# EAGLE board dual-channel-buck-v0 (EAGLE 5.07)
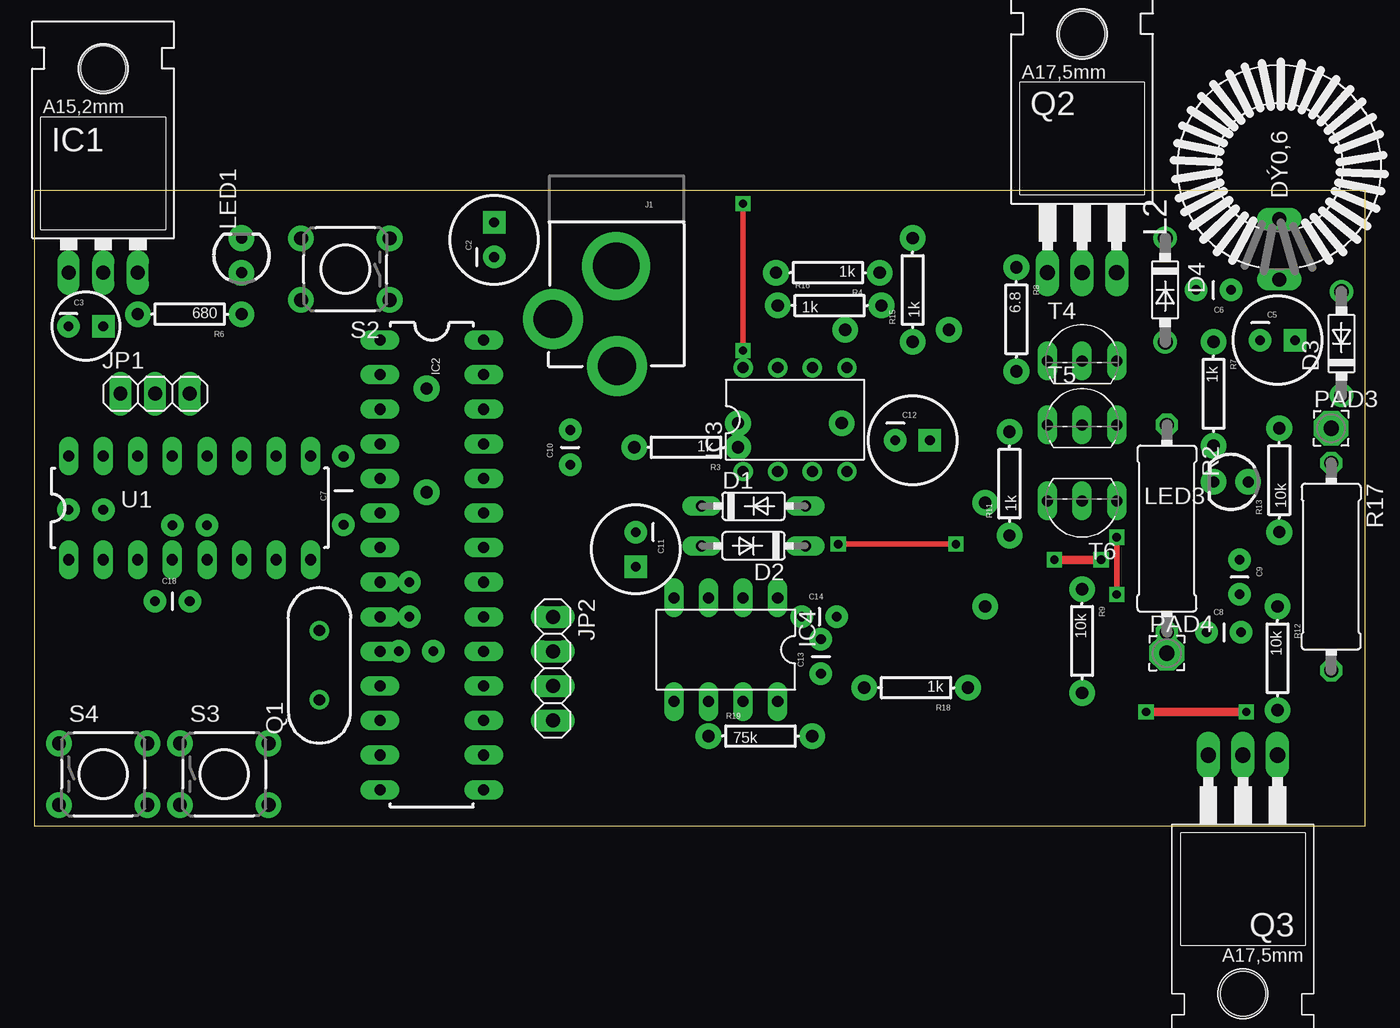
[diagram p0: board, top side]
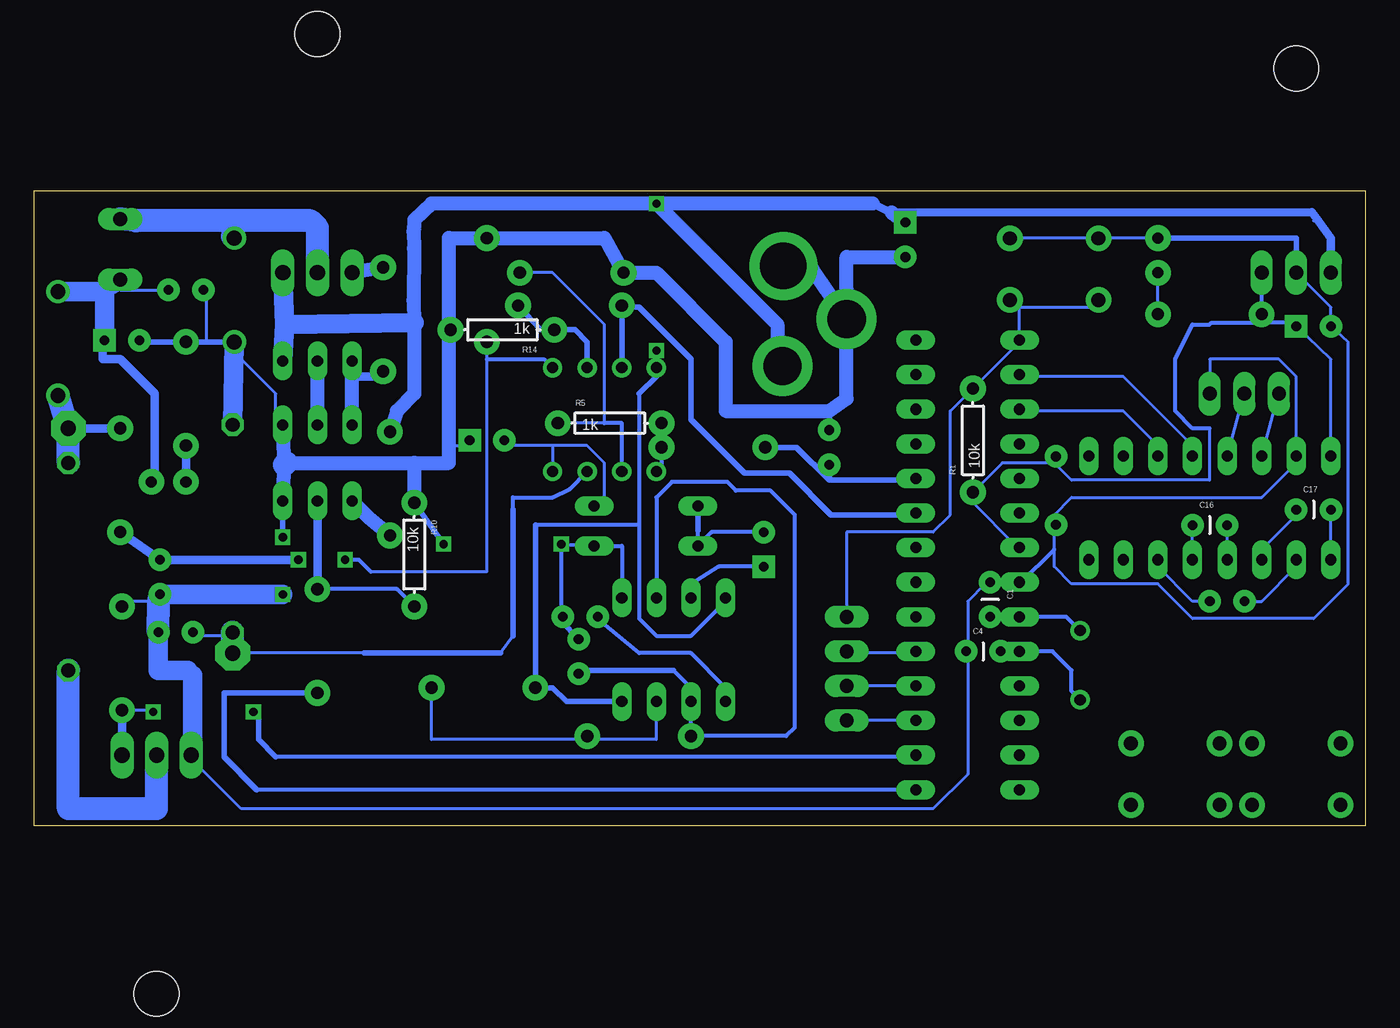
[diagram p1: board, bottom side, seen from below]

Size 97.77 x 46.66 mm. Coordinates in mm from the lower left corner, seen from the top.
Outline: 0,0 97.77,0 97.77,46.66 0,46.66 0,0
Copper layers (1*16): Top 0.035mm / dielectric 1.5mm / Bottom 0.035mm
Design rules "SparkFun-diy": minimum track width 8mil, minimum drill 20mil, track to track 10mil, track to pad 10mil, pad to pad 10mil, via to via 10mil, smd to smd 10mil, copper to edge 10mil, drill to drill 8mil, minimum pad ring 12mil, minimum via ring 10mil, stop-mask expansion 4mil, vias tented up to drill 25mil, thermal gap 10mil

## Footprints (pad centres in the part's own frame; a part is rotated, then mirrored left to right if it is on the bottom)
CAP-PTH-SMALL = drill 0.7 pad 1.651 round: 1 0,0; 2 2.54,0
CPOL-RADIAL-100UF-25V = drill 0.7 pad 1.651 square: 1 1.27,0 | drill 0.7 pad 1.651 round: 2 -1.27,0
CPOL-RADIAL-10UF-25V = drill 0.7 pad 1.651 square: 1 1.27,0 | drill 0.7 pad 1.651 round: 2 -1.27,0
CAP-PTH-5MM = drill 0.7 pad 1.651 round: 1 -2.5,0; 2 2.5,0
DO35-7 = drill 0.813 long: A 3.81,0; C -3.81,0
DO41-7.6 = drill 1.1 pad 1.7 round: A 3.81,0; C -3.81,0
78XXL = drill 1.016 long: GND 0,-3.81; IN -2.54,-3.81; OUT 2.54,-3.81 | hole 3.302: 0,11.176
DIL28-3 = drill 0.813 long: 1 -16.51,-3.81; 2 -13.97,-3.81; 3 -11.43,-3.81; 4 -8.89,-3.81; 5 -6.35,-3.81; 6 -3.81,-3.81; 7 -1.27,-3.81; 8 1.27,-3.81; 9 3.81,-3.81; 10 6.35,-3.81; 11 8.89,-3.81; 12 11.43,-3.81; 13 13.97,-3.81; 14 16.51,-3.81; 15 16.51,3.81; 16 13.97,3.81; 17 11.43,3.81; 18 8.89,3.81; 19 6.35,3.81; 20 3.81,3.81; 21 1.27,3.81; 22 -1.27,3.81; 23 -3.81,3.81; 24 -6.35,3.81; 25 -8.89,3.81; 26 -11.43,3.81; 27 -13.97,3.81; 28 -16.51,3.81
DIL08 = drill 0.813 pad 1.27 round: 1 -3.81,-3.81; 2 -1.27,-3.81; 3 1.27,-3.81; 4 3.81,-3.81; 5 3.81,3.81; 6 1.27,3.81; 7 -1.27,3.81; 8 -3.81,3.81
DIL-08 = drill 0.813 long: 1 -3.81,-3.81; 2 -1.27,-3.81; 3 1.27,-3.81; 4 3.81,-3.81; 5 3.81,3.81; 6 1.27,3.81; 7 -1.27,3.81; 8 -3.81,3.81
POWER_JACK_2.1X5.5_BIG_PTH = drill 3.4 pad 5 round: GND -0.053,7.35 | drill 2.8 pad 4.4 round: GNDBREAK -4.7,3.451; PWR 0,0
1X03 = drill 1.016 long: 1 -2.54,0; 2 0,0; 3 2.54,0
1X04 = drill 1.016 long: 1 -3.81,0; 2 -1.27,0; 3 1.27,0; 4 3.81,0
ED16 = drill 1.016 long: 1 -8.255,0; 2 -3.81,0
LED3MM = drill 0.813 pad 1.88 round: A -1.27,0; K 1.27,0
2,54/1,1 = drill 1.118 pad 2.54 octagon: 1 0,0
HC49US = drill 0.813 round: 1 -2.54,0; 2 2.54,0
TO220BH = drill 1.118 long: D 0,-6.35; G -2.54,-6.35; S 2.54,-6.35 | hole 3.302: 0,11.176
TO220 = drill 1.118 long: 1 -2.54,-6.35; 2 0,-6.35; 3 2.54,-6.35 | hole 3.302: 0,11.176
AXIAL-0.3 = drill 0.9 pad 1.88 round: P$1 -3.81,0; P$2 3.81,0
0414/15 = drill 1.016 octagon: 1 -7.62,0; 2 7.62,0
TACTILE-PTH = drill 1.016 pad 1.88 round: 1 -3.251,2.261; 2 3.251,2.261; 3 -3.251,-2.261; 4 3.251,-2.261
TO92-EBC = drill 0.813 long: B 0,-1.27; C 2.54,-1.27; E -2.54,-1.27
DIL16 = drill 0.813 long: 1 -8.89,-3.81; 2 -6.35,-3.81; 3 -3.81,-3.81; 4 -1.27,-3.81; 5 1.27,-3.81; 6 3.81,-3.81; 7 6.35,-3.81; 8 8.89,-3.81; 9 8.89,3.81; 10 6.35,3.81; 11 3.81,3.81; 12 1.27,3.81; 13 -1.27,3.81; 14 -3.81,3.81; 15 -6.35,3.81; 16 -8.89,3.81

## Placement (x,y rotation side)
C1  22  [CAP-PTH-SMALL]  27.56,17.91 270 bottom
C2  100uf  [CPOL-RADIAL-100UF-25V]  33.78,43.05 90 top
C3  10uf  [CPOL-RADIAL-10UF-25V]  3.81,36.7 0 top
C4  22  [CAP-PTH-SMALL]  29.34,12.83 0 bottom
C5  470uf  [CPOL-RADIAL-100UF-25V]  91.31,35.69 0 top
C6  0.01  [CAP-PTH-SMALL]  87.88,39.37 180 top
C7  0.1  [CAP-PTH-5MM]  22.73,24.64 90 top
C8  [CAP-PTH-SMALL]  86.11,14.22 0 top
C9  [CAP-PTH-SMALL]  88.52,19.56 270 top
C10  [CAP-PTH-SMALL]  39.37,26.54 90 top
C11  100uf  [CPOL-RADIAL-100UF-25V]  44.2,20.32 270 top
C12  100uf  [CPOL-RADIAL-100UF-25V]  64.52,28.32 0 top
C13  0.01  [CAP-PTH-SMALL]  57.78,11.18 90 top
C14  0.01  [CAP-PTH-SMALL]  56.39,15.37 0 top
C16  0.1  [CAP-PTH-SMALL]  12.7,22.1 0 bottom
C17  0.1  [CAP-PTH-SMALL]  5.08,23.24 0 bottom
C18  0.1  [CAP-PTH-SMALL]  8.89,16.51 0 top
D1  1N4148DO35-7  [DO35-7]  52.83,23.5 0 top
D2  1N4148DO35-7  [DO35-7]  52.83,20.57 180 top
D3  1N5819-B  [DO41-7.6]  96.01,35.43 90 top
D4  1N5819-B  [DO41-7.6]  83.06,39.37 270 top
IC1  7805  [78XXL]  5.08,44.45 0 top
IC2  AVR-MEGA8-PPTH  [DIL28-3]  29.21,19.18 270 top
IC3  TL062P  [DIL08]  55.88,29.84 0 top
IC4  NE555  [DIL-08]  50.8,12.95 180 top
J1  POWER_JACKPTH_BIG  [POWER_JACK_2.1X5.5_BIG_PTH]  42.8,33.78 0 top
JP1  [1X03]  8.89,31.75 0 top
JP2  [1X04]  38.1,11.56 270 top
L2  [ED16]  91.44,48.39 90 top
LED1  RED  [LED3MM]  15.24,41.91 90 top
LED3  RED  [LED3MM]  87.88,25.27 180 top
PAD3  [2,54/1,1]  95.25,29.21 0 top
PAD4  [2,54/1,1]  83.19,12.7 0 top
Q1  [HC49US]  20.95,11.81 90 top
Q2  [TO220BH]  76.96,46.99 0 top
Q3  IRF540  [TO220]  88.77,-1.14 180 top
R1  10k  [AXIAL-0.3]  28.83,28.32 90 bottom
R2  0.1R  [0414/15]  83.19,21.84 270 top
R3  1k  [AXIAL-0.3]  47.88,27.81 180 top
R4  1k  [AXIAL-0.3]  58.29,40.64 180 top
R5  1k  [AXIAL-0.3]  55.5,29.59 0 bottom
R6  680  [AXIAL-0.3]  11.43,37.59 180 top
R7  1k  [AXIAL-0.3]  86.61,31.75 270 top
R8  6.8  [AXIAL-0.3]  72.14,37.21 270 top
R9  10k  [AXIAL-0.3]  76.96,13.59 270 top
R10  10k  [AXIAL-0.3]  69.85,19.94 270 bottom
R11  1k  [AXIAL-0.3]  71.63,25.15 90 top
R12  10k  [AXIAL-0.3]  91.31,12.32 270 top
R13  10k  [AXIAL-0.3]  91.44,25.4 90 top
R14  1k  [AXIAL-0.3]  63.37,36.45 180 bottom
R15  1k  [AXIAL-0.3]  64.52,39.37 90 top
R16  1k  [AXIAL-0.3]  58.42,38.23 0 top
R17  1R/5W  [0414/15]  95.25,19.05 270 top
R18  1k  [AXIAL-0.3]  64.77,10.16 180 top
R19  75k  [AXIAL-0.3]  53.34,6.6 0 top
S2  [TACTILE-PTH]  22.86,40.89 180 top
S3  [TACTILE-PTH]  13.97,3.81 0 top
S4  [TACTILE-PTH]  5.08,3.81 0 top
T4  [TO92-EBC]  76.96,35.43 0 top
T5  [TO92-EBC]  76.96,30.73 0 top
T6  [TO92-EBC]  76.96,22.61 180 top
U1  MAX232PTH  [DIL16]  11.43,23.37 0 top

## Library data of the parts
C1-C14 C16-C18 IC1 IC2 LED1 LED3 Q1 R1 R3-R16 R18 R19 S2-S4 U1 = SparkFun
D1-D4 = diode
IC3 = linear
IC4 = st-microelectronics
J1 L2 T4-T6 = digital-toy
JP1 JP2 = pinhead
PAD3 PAD4 = wirepad
Q2 = transistor-power
Q3 = transistor-fet
R2 R17 = rcl

## Nets
5V: C3.1 C7.2 IC1.OUT IC2.7 R1.P$1 R6.P$2 U1.16
-VCC: C12.2 D1.A IC3.4
CUR: C8.1 IC3.3 PAD4.1 R2.2
GND: C1.1 C2.2 C3.2 C4.1 C5.2 C6.2 C7.1 C8.2 C9.2 C10.2 C12.1 C13.2 C14.2 D2.C D4.A IC1.GND IC2.8 IC4.1 J1.GND J1.GNDBREAK JP1.3 LED1.K Q3.3 R2.1 R4.P$2 R7.P$1 R10.P$1 R12.P$1 R14.P$2 R15.P$2 S2.3 S2.4 T5.C T6.E U1.15
I_ADC: C10.1 IC2.24 R3.P$2
MISO: IC2.18 JP2.3
MOSI: IC2.17 JP2.4
N$1: D3.C PAD3.1 R13.P$2 R17.1
N$2: C1.2 IC2.9 Q1.2
N$3: C4.2 IC2.10 Q1.1
N$4: Q3.2 R17.2
N$5: IC3.2 R4.P$1 R5.P$1
N$6: IC3.1 R3.P$1 R5.P$2
N$7: IC3.6 R14.P$1 R16.P$2
N$9: R9.P$1 R10.P$2 T6.B
N$10: LED1.A R6.P$1
N$11: IC4.7 R18.P$1 R19.P$2
N$12: C13.1 IC4.2 IC4.6 R19.P$1
N$13: R11.P$1 T6.C
N$14: C14.1 IC4.5
N$16: T4.B T5.B
N$17: R8.P$2 T4.E T5.E
N$18: LED3.K R7.P$2
N$19: C11.1 IC4.3
N$20: Q2.G R8.P$1
N$21: C5.1 C6.1 D3.A L2.1 LED3.A
N$22: D4.C L2.2 Q2.D
N$23: C11.2 D1.C D2.A
N$24: C17.2 U1.1
N$25: C17.1 U1.3
N$28: C16.2 U1.4
N$29: C16.1 U1.5
N$30: C18.1 U1.2
N$31: C18.2 U1.6
N$32: JP1.1 U1.14
N$33: JP1.2 U1.13
PWM: IC2.15 R9.P$2
PWM_DIS: IC2.16 Q3.1 R12.P$2
RS232_RX: IC2.2 U1.12
RS232_TX: IC2.3 U1.11
RST: IC2.1 JP2.1 R1.P$2 S2.1 S2.2
SCK: IC2.19 JP2.2
V_ADC: IC2.23 IC3.7 R16.P$1
VCC: C2.1 IC1.IN IC3.8 IC4.4 IC4.8 J1.PWR Q2.S R11.P$2 R18.P$2 T4.C
VOLTAGE: C9.1 IC3.5 R13.P$1 R15.P$1

## Tracks (layer width: path | path; a pad name or v marks a point on that pad's centre or on a via)
5V
  Bottom 0.203: IC2.7 25.4,20.32 29.21,24.13 R1.P$1 26.67,26.67 22.86,26.67 | C3.1 2.54,34.29 U1.16 | 22.86,26.67 21.59,25.4 11.43,25.4 11.43,29.21 | 22.86,26.67 C7.2
  Bottom 0.305: 7.62,36.96 R6.P$2 IC1.OUT | 11.43,29.21 12.7,29.21 13.97,30.48 13.97,34.29 12.7,36.83 11.43,36.83 11.3,36.96 7.62,36.96 | C3.1 5.33,36.96 7.62,36.96
-VCC
  Bottom 0.203: 59.69,27.94 63.25,27.94 C12.2 | 59.69,27.94 57.15,27.94 55.88,26.67 55.88,24.13 D1.A | 59.69,27.94 IC3.4
CUR
  Bottom 0.203: C8.1 85.72,13.97 83.82,13.97 PAD4.1 73.53,12.7 | 62.61,13.97 63.5,12.7
  Bottom 0.305: IC3.3 58.42,24.77 59.69,24.13 62.61,24.13 62.61,23.24
  Bottom 0.406: 62.61,13.97 62.61,23.24 | 63.5,12.7 73.53,12.7
  Bottom 1.676: PAD4.1 R2.2
GND  (via drill 0.6)
  Top 0.406: v79.5,17.02 v79.5,21.21 | v67.69,20.7 v59.05,20.7
  Bottom 0.203: R2.1 82.55,34.29 80.01,31.75 80.01,30.48 T5.C | 85.09,35.56 85.09,39.37 C6.2 | R12.P$1 91.44,16.51 88.9,16.51 88.61,16.52 | IC1.GND 2.54,38.1 C3.2 1.27,35.56 1.27,17.78 3.81,15.24 12.7,15.24 15.24,17.78 21.59,17.78 22.86,19.05 22.86,20.32 22.86,21.59 C7.1 22.86,22.86 21.59,24.13 7.62,24.13 5.08,26.67 U1.15 5.08,33.02 6.35,34.29 11.43,34.29 JP1.3 | LED1.K 19.05,43.18 S2.4 20.32,43.18 25.4,43.18 S2.3 26.67,43.18 | 25.4,17.78 IC2.8 | J1.GNDBREAK 38.1,39.37 | 59.05,15.11 C14.2 | 67.31,27.94 65.79,27.94 C12.1 | R4.P$2 54.61,40.64 | 29.21,12.7 29.21,16.51 27.94,17.78 C1.1 | 29.21,12.7 29.21,3.81 31.75,1.27 82.55,1.27 86.36,5.08 Q3.3 | 29.21,12.7 C4.1
  Bottom 0.305: IC2.8 C1.1 | 22.86,20.32 25.4,17.78 | IC4.1 54.61,20.57 D2.C v59.05,20.7 59.05,15.11
  Bottom 0.406: D4.A 85.09,35.56 R7.P$1 89.79,35.56 C5.2 | v79.5,21.21 T6.E | IC1.GND 5.08,43.18 LED1.K | Q3.3 arc-90 86.11,5.33 | 86.11,11.05 86.87,11.43 | 59.05,15.11 C13.2 | R10.P$1 v67.69,20.7 | R14.P$2 67.18,36.7 67.31,36.83 | 39.37,30.48 C10.2
  Bottom 0.61: 86.11,11.05 86.49,11.43
  Bottom 1.016: T5.C 79.38,26.54 T6.E | 79.25,26.67 69.85,26.67 | 69.85,26.67 67.31,26.67 67.31,27.94 67.31,36.83 67.31,43.18 R15.P$2 55.88,43.18 R4.P$2 52.07,40.64 46.99,35.56 46.99,30.48 39.37,30.48 38.1,31.37 J1.GNDBREAK 40.6,40.88 J1.GND | 38.1,39.37 38.1,41.78 C2.2 | 69.85,26.67 R10.P$1
  Bottom 1.422: R2.1 D4.A | C9.2 v79.5,17.02 | 86.49,11.43 88.65,11.43 C8.2 | 86.11,5.33 86.11,11.05
  Bottom 1.676: C9.2 88.61,16.52 C8.2 | 79.38,26.54 79.25,26.67
I_ADC
  Bottom 0.203: IC2.24 33.02,25.4
  Bottom 0.406: 33.02,25.4 39.37,25.4 | 39.37,25.4 41.78,27.81 R3.P$2 | 39.37,25.4 C10.1
MISO
  Bottom 0.203: IC2.18 JP2.3
MOSI
  Bottom 0.203: IC2.17 JP2.4
N$1
  Bottom 0.61: PAD3.1 R13.P$2
  Bottom 1.676: D3.C PAD3.1 R17.1
N$2
  Bottom 0.305: C1.2 IC2.9 21.97,15.37 Q1.2
N$3
  Bottom 0.305: C4.2 IC2.10 22.99,12.83 21.59,11.43 21.59,9.91 Q1.1
N$4
  Bottom 1.676: Q3.2 88.77,1.27 95.25,1.27 R17.2
N$5
  Bottom 0.203: R5.P$1 55.88,29.59 55.88,36.83 59.69,40.64 R4.P$1
  Bottom 0.305: IC3.2 54.61,29.59 55.88,29.59
N$6
  Bottom 0.203: R3.P$1 R5.P$2
  Bottom 0.305: IC3.1 51.69,26.04 R3.P$1
N$7
  Bottom 0.406: IC3.6 57.15,35.56 58.04,36.45 R14.P$1 60.58,36.45 R16.P$2
N$9
  Bottom 0.305: R10.P$2 71.12,17.4 R9.P$1
  Bottom 0.61: R9.P$1 T6.B
N$10
  Bottom 0.203: R6.P$1 LED1.A
N$11
  Bottom 0.203: 57.15,6.35 52.07,6.35 IC4.7 | 57.15,6.35 68.58,6.35 R18.P$1 | 57.15,6.35 R19.P$2
N$12
  Bottom 0.203: 57.15,11.43 C13.1
  Bottom 0.305: IC4.2 52.07,24.13 50.93,25.27 46.86,25.27 46.23,24.64 43.69,24.64 41.91,22.86 41.91,7.24 42.55,6.6 R19.P$1 IC4.6 | 49.53,10.16 50.8,11.43
  Bottom 0.406: 50.8,11.43 57.15,11.43 | IC4.6 49.53,10.16
N$13
  Bottom 1.016: R11.P$1 73.15,22.61 T6.C
N$14
  Bottom 0.203: 56.26,15.11 C14.1
  Bottom 0.305: 46.99,10.16 49.53,12.7 53.34,12.7 56.26,15.11
  Bottom 0.406: IC4.5 46.99,10.16
N$16
  Bottom 1.016: T5.B T4.B
N$17
  Bottom 0.61: R8.P$2 72.52,33.02 74.42,33.02
  Bottom 1.016: T5.E 74.42,33.02 T4.E
N$18
  Bottom 0.61: LED3.K R7.P$2
N$19
  Bottom 0.305: C11.1 47.5,19.05 49.53,17.78 IC4.3
N$20
  Bottom 1.016: R8.P$1 Q2.G
N$21
  Bottom 0.203: 87.63,39.37 C6.1 91.44,39.37 L2.1
  Bottom 0.61: LED3.A 88.9,25.91 88.9,31.75 91.44,34.29 92.71,34.29 92.71,35.05 C5.1
  Bottom 1.422: 92.58,39.24 92.71,39.37 L2.1 | 92.58,39.24 D3.A | C5.1 92.58,39.24
N$22
  Bottom 1.676: Q2.D 76.96,43.94 77.47,44.45 83.19,44.45 | 83.19,44.45 90.3,44.45 L2.2 | D4.C 83.19,43.31 83.19,44.45
N$23
  Bottom 0.305: 49.02,21.72 D2.A 48.01,21.59 C11.2
  Bottom 0.406: 49.02,21.72 D1.C
N$24
  Bottom 0.203: U1.1 C17.2
N$25
  Bottom 0.203: U1.3 7.62,20.32 5.08,22.86 C17.1
N$28
  Bottom 0.203: U1.4 C16.2
N$29
  Bottom 0.203: U1.5 C16.1
N$30
  Bottom 0.203: C18.1 7.62,16.51 5.08,19.05 U1.2
N$31
  Bottom 0.203: C18.2 12.7,16.51 15.24,19.05 U1.6
N$32
  Bottom 0.203: U1.14 JP1.1
N$33
  Bottom 0.203: U1.13 JP1.2
PWM
  Bottom 0.305: IC2.15 81.41,2.67
  Bottom 0.406: 81.41,2.67 83.82,5.08 83.82,9.78 R9.P$2
PWM_DIS  (via drill 0.6)
  Top 0.61: v81.66,8.38 v89.03,8.38
  Bottom 0.203: R12.P$2 89.41,8.51 v89.03,8.38
  Bottom 0.305: 33.15,5.08 80.01,5.08
  Bottom 0.406: IC2.16 arc90 33.15,5.08 | 80.01,5.08 81.28,6.35 81.28,8 v81.66,8.38
  Bottom 0.61: R12.P$2 Q3.1
RS232_RX
  Bottom 0.203: U1.12 12.7,27.94 17.78,33.02 25.4,33.02 IC2.2
RS232_TX
  Bottom 0.203: U1.11 15.24,27.94 17.78,30.48 25.4,30.48 IC2.3
RST
  Bottom 0.203: 25.4,38.1 IC2.1 25.4,35.56 R1.P$2 | 25.4,38.1 20.32,38.1 S2.2 | 25.4,38.1 S2.1 | JP2.1 38.1,21.59 31.75,21.59 30.48,22.86 30.48,30.48 R1.P$2 | R1.P$2 29.21,31.75
SCK
  Bottom 0.203: IC2.19 33.02,12.7 38.1,12.7 JP2.2
V_ADC
  Bottom 0.203: IC2.23 33.02,22.86
  Bottom 0.406: 33.02,22.86 39.24,22.86 42.29,25.91 45.59,25.91 49.53,29.84 49.53,34.29 53.34,38.1 54.48,38.1 R16.P$1 IC3.7
VCC  (via drill 0.6)
  Top 0.406: v52.07,45.72 v52.07,34.92
  Bottom 0.203: 3.59,44.61 3.81,44.45 | 69.87,42.42 69.85,41.91
  Bottom 0.305: 53.34,22.1 53.34,15.24 52.07,13.97 49.53,13.97 46.99,16.51 IC4.4 | 53.34,31.75 53.34,22.1 | 53.34,22.1 60.96,22.1
  Bottom 0.406: IC4.8 58.67,9.14 59.69,10.16 R18.P$2 60.96,22.1 | 53.34,31.75 52.07,33.02 IC3.8 v52.07,34.92
  Bottom 0.61: IC1.IN 2.54,43.18 3.59,44.61 3.94,45.09 34.8,45.05 36.2,45.72
  Bottom 1.016: v52.07,45.72 68.58,45.72 69.85,44.5 arc5 69.9,43.69 69.87,42.42 69.91,38.59 69.85,36.96 69.85,31.75 71.12,30.48 R11.P$2 | 34.8,45.05 C2.1 | 36.2,45.72 v52.07,45.72 | v52.07,45.72 43.18,36.83 43.18,34.29 J1.PWR
  Bottom 1.422: 69.85,36.96 79.38,36.83 | 79.38,36.83 Q2.S | 79.38,36.83 T4.C
VOLTAGE  (via drill 0.6)
  Top 0.61: v74.93,19.56 v78.36,19.56
  Bottom 0.203: R15.P$1 64.52,34.29 64.52,18.67 73.03,18.67
  Bottom 0.305: 73.03,18.67 73.91,19.56 v74.93,19.56 | IC3.5 60.33,34.29 64.52,34.29
  Bottom 0.61: v78.36,19.56 C9.1 R13.P$1